# Altium PCB YAVP.PcbDoc (part 2 of 4)
Units mil, origin at the board's own origin, x right, y up, seen from the top; angles counter-clockwise.
Board outline 3188.93 x 2893.7 mil, 6 copper layers (Top Layer, Top, Mid-Layer 1, Top-Int, Mid-Layer 2, Bop-Int, Mid-Layer 3, Top-Mid, Mid-Layer 4, Bop-Mid, Bottom Layer, Bottom); 418 components, 278 nets, 1150 pads, 440 vias.
Unrouted connection lines stored in the file: 12.
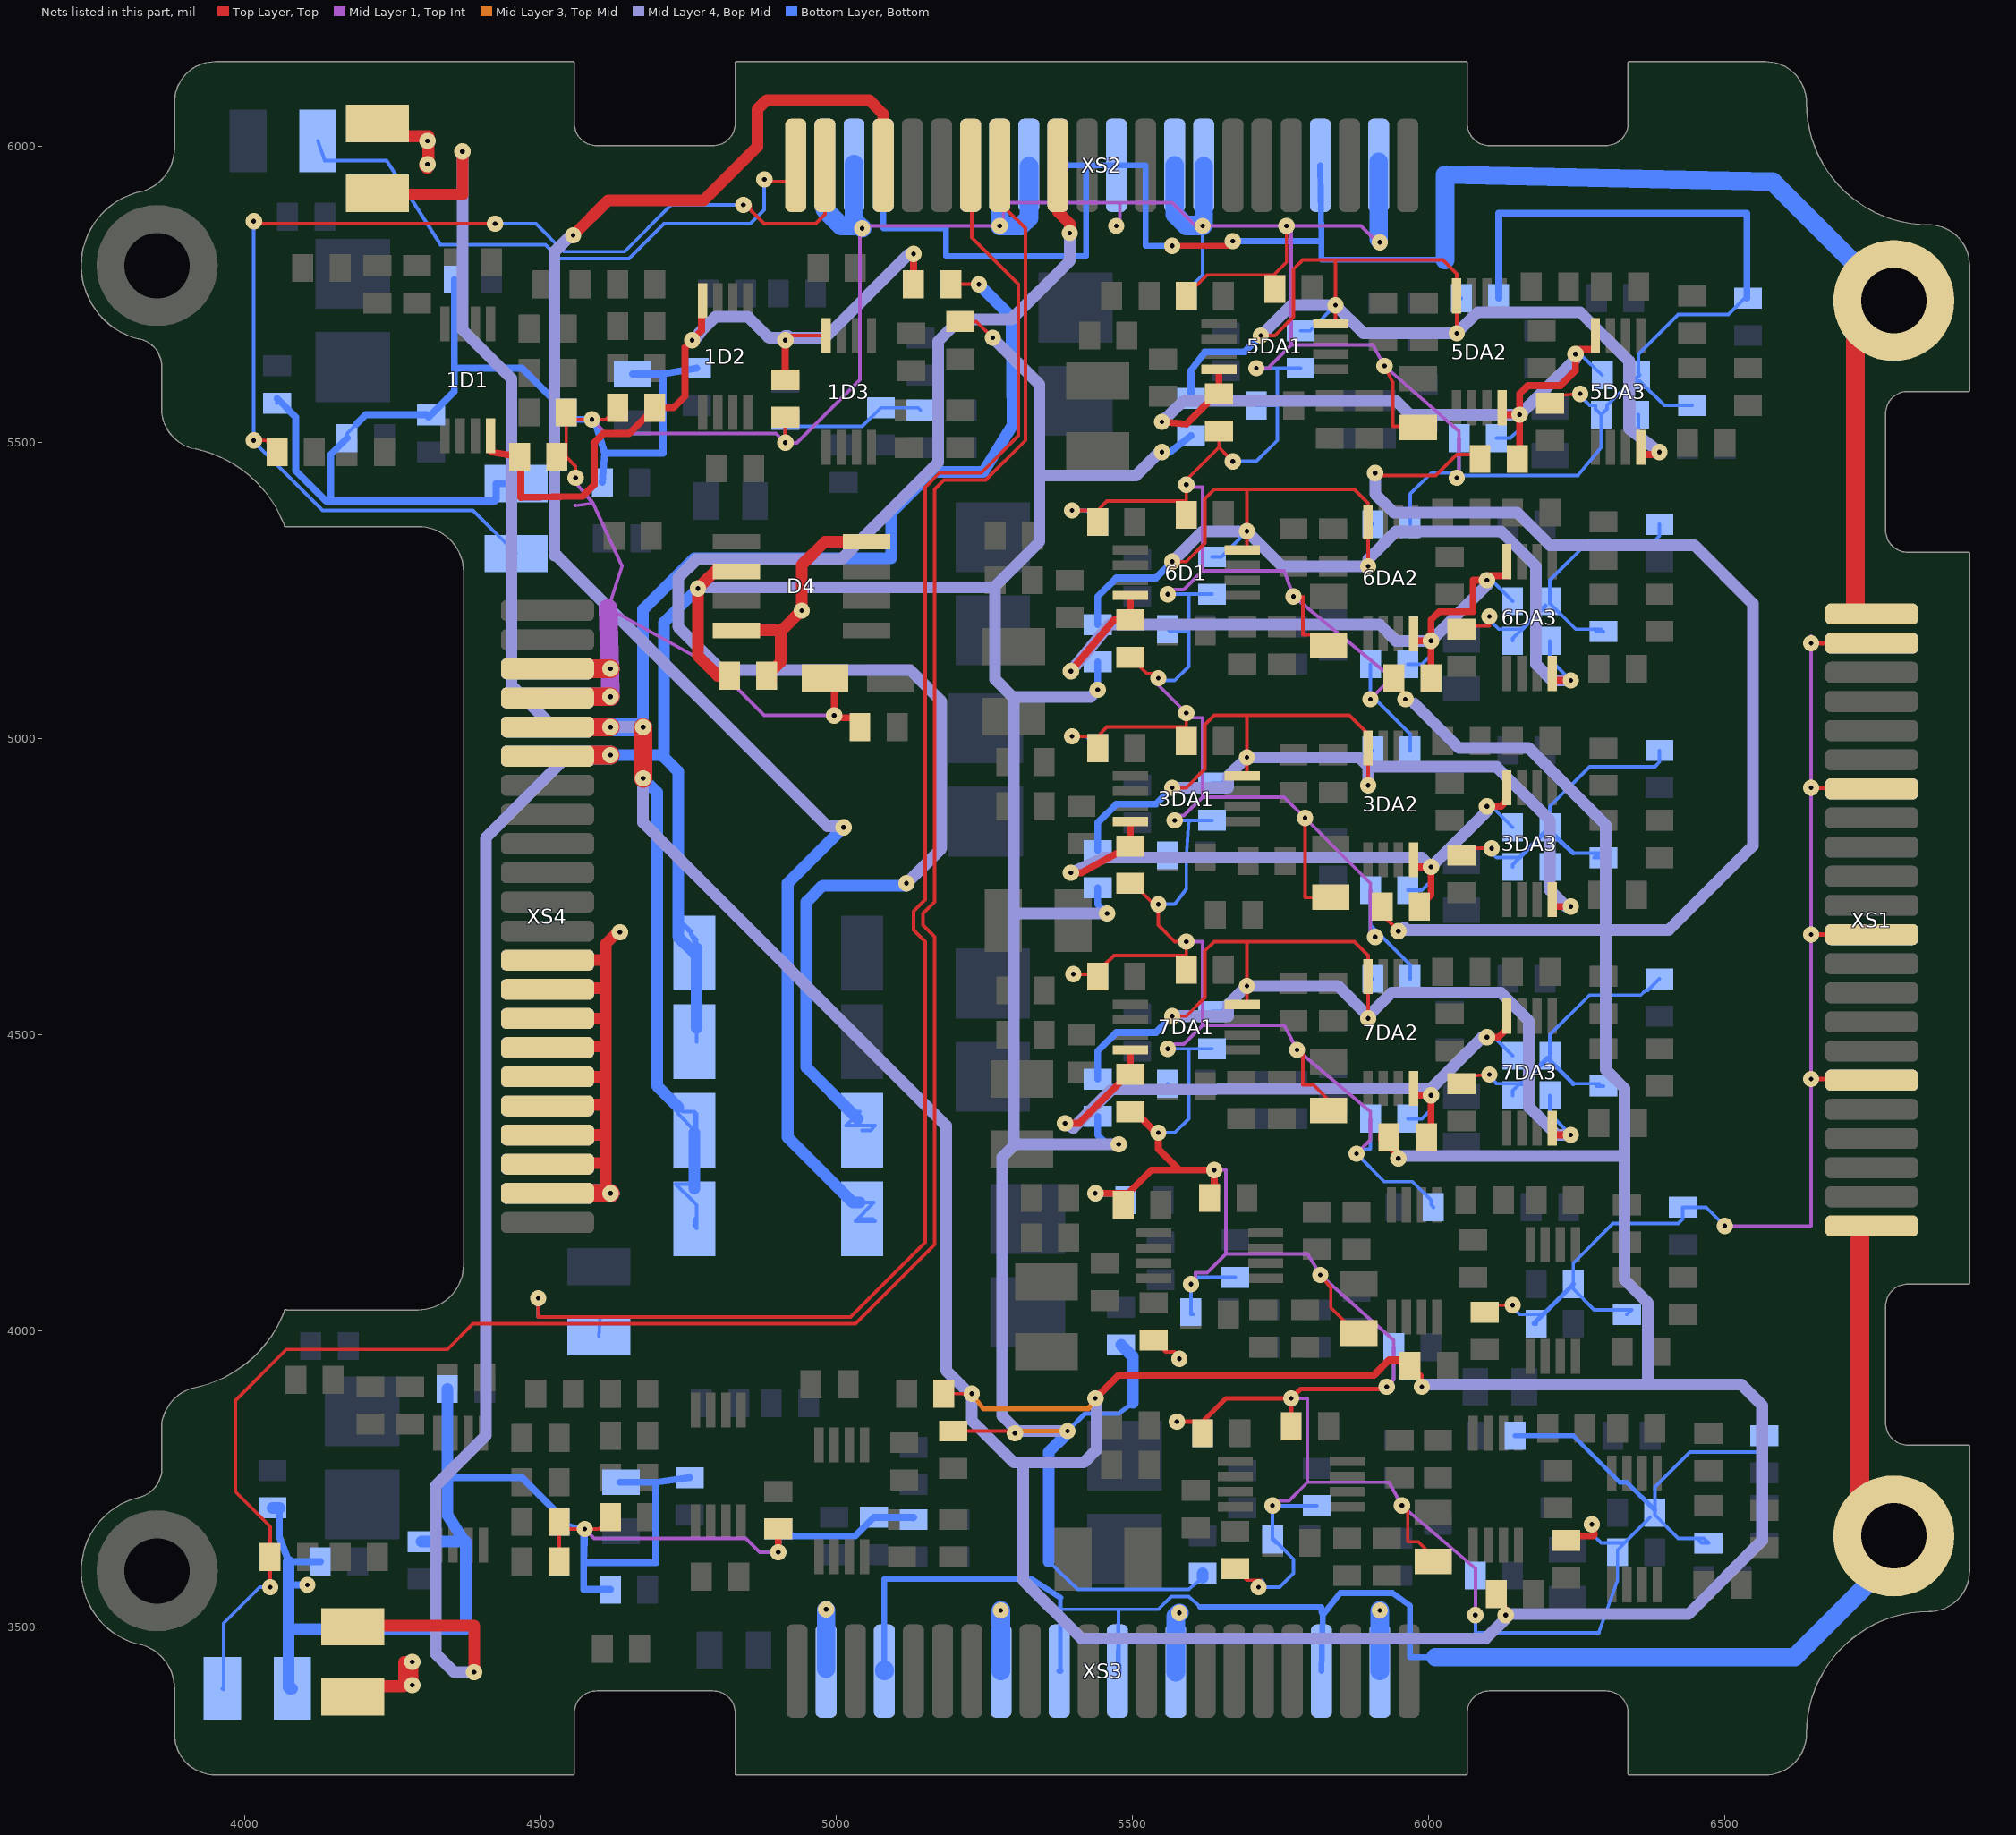
[diagram p6: the nets of this part, all layers, seen from the top]

## Via types
v1: diameter 27.56, hole 7.87, Top Layer, Top to Bottom Layer, Bottom, 440 vias

## Nets (pads, with @x,y where several pads share a name; then routed paths per layer and width w, separated by ;. In a path a pad name is that pad's centre, name@x,y a point inside that pad or via, vN(x,y) a via of type N, cw(c..) or ccw(c..) an arc to the next point about the centre after c; other vN are vias at no path point) (continued)
+15V: C3.2 C11.1 D4.2 R3.2 R4.2 R29.2 R31.2 R33.2 R35.2 R37.2 R39.2 R41.2 R43.2 XS4.16 XS4.37 | length 8216.2
  Top Layer, Top w5.91: v1@4771.65,5259.84 4771.65,5261.81 4775.59,5265.75 4777.56,5265.75 4779.53,5265.75 ; D4.2@4795.28,5283.46 D4.2@4834.65,5283.46 ; D4.2@4830.71,5282.68 D4.2@4833.86,5282.68 ; D4.2@4844.49,5284.65 4843.31,5283.46 D4.2@4842.52,5283.46 ; R31.2@5196.85,3830.71 5200.79,3830.71 5299.21,3830.71 v1(5301.18,3826.77) ; R29.2@5208.66,5704.72 5236.22,5704.72 v1(5263.78,5677.17) ; D4.2@4833.86,5282.68 4841.73,5282.68 D4.2@4842.52,5283.46 ; D4.2@4833.86,5282.68 D4.2@4834.65,5283.46 ; D4.2@4834.65,5283.46 D4.2@4842.52,5283.46
  Top Layer, Top w19.68: C3.2@4183.07,3500 4149.61,3501.97 4387.8,3501.97 v1(4387.8,3423.23) ; C11.1@4818.9,5106.3 4799.21,5106.3 4765.75,5139.76 v1(4765.75,5253.94) 4771.65,5259.84 4777.56,5265.75 4795.28,5283.46 4803.15,5283.46 4803.94,5282.68 D4.2@4830.71,5282.68
  Top Layer, Top w31.5: XS4.37@4511.81,4970.47 4511.81,4968.5 4515.75,4972.44 v1(4618.11,4972.44)
  Mid-Layer 3, Top-Mid w7.87: v1(5301.18,3826.77) 5307.09,3830.71 5385.83,3830.71 v1(5389.76,3830.71)
  Mid-Layer 4, Bop-Mid w5.91: 5299.21,4700.79 5303.15,4704.72 5299.21,4704.72 ; v1(5476.38,4314.96) v1@5480.31,4314.96 ; v1@5545.28,5484.25 v1(5549.21,5484.25)
  Mid-Layer 4, Bop-Mid w19.68: v1(4387.8,3423.23) 4354.33,3423.23 4322.83,3454.72 4322.83,3738.19 4407.48,3822.83 4407.48,4832.68 4545.28,4970.47 4616.14,4970.47 v1(4618.11,4972.44) ; v1(4765.75,5253.94) 4767.72,5255.91 4771.65,5255.91 5263.78,5255.91 5264.76,5254.92 ; v1(5263.78,5677.17) 5342.52,5598.43 5342.52,5444.88 ; 5299.21,4700.79 5299.21,4312.99 ; 5299.21,4704.72 5299.21,5070.87 ; 5303.15,4704.72 v1(5456.69,4704.72) ; v1(5389.76,3830.71) 5305.12,3830.71 5279.53,3856.3 5279.53,4293.31 5299.21,4312.99 ; v1(5440.94,5082.68) 5429.13,5070.87 5299.21,5070.87 ; v1(5476.38,4314.96) 5301.18,4314.96 5299.21,4312.99 ; v1@5545.28,5484.25 5505.91,5444.88 5342.52,5444.88 ; 5264.76,5254.92 5342.52,5332.68 5342.52,5444.88 ; 5264.76,5254.92 5263.78,5253.94 5265.75,5253.94 ; 5264.76,5254.92 5265.75,5253.94 ; 5265.75,5253.94 5267.72,5255.91 5267.72,5100.39 5299.21,5068.9 5299.21,5070.87
  Bottom Layer, Bottom w5.91: R4.2@4732.28,4692.91 R4.2@4753.94,4671.26 ; R4.2@4732.28,4696.85 4753.94,4675.2 R4.2@4753.94,4671.26 ; R4.2@4759.84,4641.73 R4.2@4763.78,4645.67 ; R3.2@4763.78,4488.19 R3.2@4763.78,4511.81 ; 5358.27,3610.24 5407.48,3562.99 5594.49,3562.99 R43.2@5618.11,3582.68 ; R4.2@4753.94,4671.26 4753.94,4669.29 R4.2@4763.78,4645.67 ; R4.2@4753.94,4671.26 4763.78,4661.42 R4.2@4763.78,4645.67
  Bottom Layer, Bottom w7.87: v1@5391.73,3832.68 5419.29,3860.24 5476.38,3860.24 5500,3877.95
  Bottom Layer, Bottom w11.81: R41.2@5440.94,4362.2 5440.94,4330.71 5456.69,4314.96 v1(5476.38,4314.96) ; R33.2@5440.94,4748.03 5440.94,4720.47 v1(5456.69,4704.72) ; v1(5440.94,5082.68) R39.2@5440.94,5129.92 ; v1(5549.21,5484.25) 5562.99,5484.25 R37.2@5598.43,5511.81
  Bottom Layer, Bottom w19.68: v1(4618.11,4972.44) 4704.72,4972.44 4708.66,4968.5 ; R4.2@4759.84,4637.8 4732.28,4665.35 4732.28,4692.91 4732.28,4696.85 4732.28,4944.88 4708.66,4968.5 ; R3.2@4763.78,4511.81 R4.2@4763.78,4645.67 ; v1(4765.75,5253.94) 4708.66,5196.85 4708.66,4968.5 ; 5358.27,3610.24 5358.27,3795.28 5385.83,3822.83 5385.83,3826.77 v1@5389.76,3826.77 ; v1@5391.73,3832.68 v1@5391.73,3828.74 ; R35.2@5480.31,3976.38 5500,3956.69 5500,3877.95 ; R43.2@5618.11,3582.68 R43.2@5618.11,3590.55 ; v1@5389.76,3826.77 v1@5391.73,3828.74 ; v1@5389.76,3826.77 v1(5389.76,3830.71) v1@5391.73,3828.74
  Bottom Layer, Bottom w31.5: XS4.16@4511.81,4970.47 4511.81,4968.5 4515.75,4972.44 v1(4618.11,4972.44)
+15V1: 3DA1.8 3DA2.8 3DA3.8 5DA1.8 5DA2.8 5DA3.8 6D1.8 6DA2.8 6DA3.8 7DA1.8 7DA2.8 7DA3.8 C18.1 C22_.1 C24.1 C26.1 C34.1 C38.1 C40.1 C42.1 C51.1 C54.1 C56.1 C58.1 R33.1 R37.1 R39.1 R41.1 | length 8221.8
  Top Layer, Top w5.91: v1(5566.93,4531.5) 5590.55,4531.5 5622.05,4562.99 5622.05,4641.73 5637.8,4657.48 5692.91,4657.48 ; v1(5566.93,4917.32) 5590.55,4917.32 5622.05,4948.82 5622.05,5023.62 5637.8,5039.37 5692.91,5039.37 ; v1(5566.93,5299.21) 5590.55,5299.21 5622.05,5330.71 5622.05,5405.51 5637.8,5421.26 5692.91,5421.26 ; 7DA1.8@5685.04,4551.18 5692.91,4551.18 v1(5692.91,4582.68) 5692.91,4657.48 ; 3DA1.8@5685.04,4937.01 5692.91,4937.01 v1(5692.91,4968.5) 5692.91,5039.37 ; 6D1.8@5685.04,5318.9 5692.91,5318.9 v1(5692.91,5350.39) 5692.91,5421.26 ; v1(5716.54,5681.1) 5740.16,5681.1 5771.65,5712.6 5771.65,5793.31 5787.4,5809.06 5842.52,5809.06 ; 5DA1.8@5834.65,5700.79 5842.52,5700.79 v1(5842.52,5732.28) 5842.52,5809.06 ; v1(5897.64,4527.56) 7DA2.8@5897.64,4598.43 5897.64,4633.86 5874.02,4657.48 5692.91,4657.48 ; v1(5897.64,4921.26) 3DA2.8@5897.64,4984.25 5897.64,5007.87 5866.14,5039.37 5692.91,5039.37 ; v1(5897.64,5291.34) 6DA2.8@5897.64,5366.14 5897.64,5397.64 5874.02,5421.26 5692.91,5421.26 ; v1(6047.24,5685.04) 5DA2.8@6047.24,5748.03 6047.24,5785.43 6023.62,5809.06 5842.52,5809.06 ; 7DA3.8@6208.66,4330.71 7DA3.8@6208.66,4342.52 ; 3DA3.8@6208.66,4716.54 3DA3.8@6208.66,4728.35 ; 6DA3.8@6208.66,5098.43 6DA3.8@6208.66,5110.24 ; 5DA3.8@6358.27,5480.31 5DA3.8@6358.27,5492.13 ; v1@6385.83,5480.31 v1(6389.76,5484.25)
  Top Layer, Top w11.81: 7DA3.8@6208.66,4330.71 v1(6240.16,4330.71) ; 3DA3.8@6208.66,4716.54 v1(6240.16,4716.54) ; 6DA3.8@6208.66,5098.43 v1(6240.16,5098.43) ; 5DA3.8@6358.27,5480.31 v1@6385.83,5480.31
  Mid-Layer 4, Bop-Mid w5.91: v1(5897.64,5291.34) v1@5897.64,5303.15 ; 6216.54,4330.71 6220.47,4326.77 6244.09,4326.77 v1(6240.16,4330.71) ; v1@6232.28,4716.54 v1(6240.16,4716.54)
  Mid-Layer 4, Bop-Mid w19.68: v1(5566.93,4531.5) 5661.42,4531.5 5661.42,4551.18 v1(5692.91,4582.68) 5846.46,4582.68 v1@5897.64,4531.5 ; v1(5566.93,4917.32) 5661.42,4917.32 5661.42,4937.01 v1(5692.91,4968.5) 5881.89,4968.5 5897.64,4952.76 ; v1(5566.93,5299.21) 5618.11,5350.39 v1(5692.91,5350.39) 5751.97,5291.34 v1(5897.64,5291.34) ; v1(5716.54,5681.1) 5767.72,5732.28 v1(5842.52,5732.28) 5889.76,5685.04 v1(6047.24,5685.04) 6082.68,5720.47 6255.91,5720.47 6338.58,5637.8 6338.58,5523.62 v1(6389.76,5484.25) ; v1(5897.64,4921.26) 5897.64,4952.76 ; v1@5897.64,5303.15 5944.88,5350.39 6122.05,5350.39 6181.1,5291.34 6181.1,5125.98 6208.66,5098.43 v1(6240.16,5098.43) ; v1@6232.28,4716.54 6204.72,4744.09 6204.72,4862.2 6114.17,4952.76 5897.64,4952.76 ; v1(6240.16,4330.71) 6228.35,4330.71 6216.54,4330.71 6169.29,4377.95 6169.29,4523.62 6122.05,4570.87 5937.01,4570.87 v1@5897.64,4531.5 ; v1@5897.64,4531.5 v1(5897.64,4527.56) 5901.57,4531.5 v1@5897.64,4531.5
  Bottom Layer, Bottom w5.91: R37.1@5590.55,5570.87 R37.1@5598.43,5574.8 ; C26.1@5633.86,4539.37 5649.61,4539.37 v1(5692.91,4582.68) ; C18.1@5633.86,4925.2 5649.61,4925.2 v1(5692.91,4968.5) ; C24.1@5633.86,5307.09 5649.61,5307.09 v1(5692.91,5350.39) ; C22_.1@5783.46,5688.98 5799.21,5688.98 v1(5842.52,5732.28) ; v1(5897.64,4527.56) 5897.64,4594.49 C42.1@5905.51,4594.49 ; v1(5897.64,4921.26) 5897.64,4980.31 C34.1@5905.51,4980.31 ; v1(5897.64,5291.34) 5897.64,5362.2 C40.1@5905.51,5362.2 ; v1(6047.24,5685.04) 6047.24,5744.09 C38.1@6055.12,5744.09 ; C58.1@6204.72,4397.64 6204.72,4366.14 v1(6240.16,4330.71) ; C51.1@6204.72,4783.46 6204.72,4751.97 v1(6240.16,4716.54) ; C56.1@6204.72,5165.35 6204.72,5133.86 v1(6240.16,5098.43) ; C54.1@6354.33,5547.24 6354.33,5515.75 6385.83,5484.25 v1(6389.76,5484.25)
  Bottom Layer, Bottom w11.81: R41.1@5440.94,4425.2 5440.94,4472.44 5472.44,4503.94 5539.37,4503.94 v1(5566.93,4531.5) ; R33.1@5440.94,4811.02 5440.94,4858.27 5472.44,4889.76 5539.37,4889.76 v1(5566.93,4917.32) ; R39.1@5440.94,5192.91 5440.94,5240.16 5472.44,5271.65 5539.37,5271.65 v1(5566.93,5299.21) ; R37.1@5598.43,5574.8 5598.43,5622.05 5622.05,5653.54 5688.98,5653.54 v1(5716.54,5681.1)
-12VCH1: R1.1 XS2.24 | length 2884.5
  Top Layer, Top w19.68: v1(4555.12,5850.39) 4614.17,5909.45 4775.59,5909.45 4866.14,6000 4866.14,6062.99 4881.89,6078.74 5055.12,6078.74 5078.74,6055.12 XS2.24@5078.74,5968.5
  Mid-Layer 4, Bop-Mid w5.91: v1@4547.24,5846.46 v1@4547.24,5854.33 ; v1@4547.24,5854.33 4551.18,5850.39 4551.18,5846.46 v1(4555.12,5850.39) 4551.18,5854.33 v1@4547.24,5854.33
  Mid-Layer 4, Bop-Mid w19.68: v1(5011.81,4850.39) 5003.94,4850.39 5001.97,4852.36 4984.25,4852.36 4527.56,5309.06 4523.62,5309.06 4523.62,5822.83 4547.24,5846.46 v1@4551.18,5850.39 ; v1@4551.18,5850.39 4555.12,5846.46 v1(4555.12,5850.39) v1@4551.18,5850.39
  Bottom Layer, Bottom w5.91: R1.1@5039.37,4216.54 5062.99,4216.54 5031.5,4185.04 5065.35,4185.04 5061.42,4188.98 R1.1@5043.31,4188.98
  Bottom Layer, Bottom w19.68: v1(5011.81,4850.39) 4917.32,4755.91 4917.32,4326.77 5027.56,4216.54 R1.1@5039.37,4216.54
-12VCH2: R2.1 XS2.30 | length 2812.1
  Top Layer, Top w19.68: XS2.30@5374.02,5968.5 5374.02,5889.76 5393.7,5870.08 v1(5393.7,5854.33)
  Mid-Layer 4, Bop-Mid w19.68: v1(5118.11,4755.91) 5177.17,4814.96 5177.17,5062.99 5124.02,5116.14 4805.12,5116.14 4732.28,5188.98 4732.28,5271.65 4763.78,5303.15 5007.87,5303.15 5171.26,5466.54 5171.26,5671.26 5208.66,5708.66 5295.28,5708.66 5393.7,5807.09 v1(5393.7,5854.33)
  Bottom Layer, Bottom w5.91: R2.1@5035.43,4358.27 R2.1@5035.43,4366.14 ; R2.1@5043.31,4338.58 5057.48,4338.58 5065.35,4346.46 5015.75,4346.46 5031.5,4362.2 R2.1@5035.43,4366.14 ; R2.1@5035.43,4366.14 5035.43,4370.08 5039.37,4370.08 R2.1@5035.43,4366.14 ; v1@5118.11,4751.97 5122.05,4755.91 5125.98,4755.91 v1(5118.11,4755.91) v1@5118.11,4751.97
  Bottom Layer, Bottom w19.68: R2.1@5035.43,4358.27 5031.5,4362.2 4948.82,4444.88 4948.82,4724.41 4976.38,4751.97 v1@5118.11,4751.97
-15V: C2.1 R1.2 R2.2 R30.2 R32.2 R34.2 R36.2 R38.2 R40.2 R42.2 R44.2 XS4.17 XS4.38 | length 13246.6
  Top Layer, Top w5.91: R32.2@5181.1,3893.7 v1(5228.35,3893.7) ; R30.2@5192.91,5767.72 v1(5240.16,5767.72) ; v1(5909.45,5448.82) 5913.39,5444.88 6011.81,5444.88 6047.24,5480.31 R38.2@6078.74,5480.31 ; R34.2@5921.26,4716.54 5917.32,4716.54 5917.32,4706.69 v1(5948.82,4675.2) ; R42.2@5933.07,4326.77 5929.13,4330.71 5917.32,4330.71 5917.32,4322.83 v1(5948.82,4291.34) ; R40.2@5940.94,5102.36 5933.07,5110.24 5933.07,5114.17 5929.13,5114.17 5946.85,5088.58 5968.5,5066.93 v1(5960.63,5066.93) ; R36.2@5956.69,3950.79 R36.2@5956.69,3952.76 ; R36.2@5968.5,3940.94 5958.66,3950.79 R36.2@5956.69,3952.76 ; v1(5988.19,3905.51) 5988.19,3925.2 5962.6,3950.79 5956.69,3956.69 R36.2@5956.69,3952.76 ; R38.2@6086.61,5472.44 R38.2@6078.74,5480.31 ; R44.2@6114.17,3555.12 R44.2@6114.17,3562.99 ; v1(6129.92,3519.68) 6129.92,3535.43 6118.11,3559.06 R44.2@6114.17,3562.99 ; R38.2@6078.74,5480.31 6082.68,5480.31 6082.68,5484.25 6074.8,5484.25 R38.2@6078.74,5480.31 ; R44.2@6114.17,3562.99 6114.17,3566.93 6110.24,3570.87 6106.3,3570.87 R44.2@6114.17,3562.99
  Top Layer, Top w11.81: v1(5437.01,3885.83) 5476.38,3925.2 5907.48,3925.2 5933.07,3950.79 5956.69,3950.79 5958.66,3950.79 R36.2@5962.6,3950.79
  Top Layer, Top w19.68: C2.1@4224.41,5921.26 4240.16,5919.29 4368.11,5919.29 v1(4368.11,5992.13)
  Top Layer, Top w31.5: XS4.38@4511.81,5019.69 v1(4618.11,5019.69) ; v1(4673.23,4933.07) v1(4673.23,5019.69)
  Mid-Layer 3, Top-Mid w7.87: v1(5228.35,3893.7) 5248.03,3868.11 5425.2,3868.11 v1(5437.01,3885.83)
  Mid-Layer 4, Bop-Mid w5.91: v1(5960.63,5066.93) 5968.5,5059.06 5976.38,5059.06
  Mid-Layer 4, Bop-Mid w19.68: v1(4368.11,5992.13) 4368.11,5690.94 4450.79,5608.27 4450.79,5088.58 4452.76,5088.58 4521.65,5019.69 v1(4618.11,5019.69) v1(4673.23,5019.69) v1(4673.23,4933.07) 4673.23,4858.27 5185.04,4346.46 5185.04,3933.07 5224.41,3893.7 v1(5228.35,3893.7) 5228.35,3848.43 5299.21,3777.56 5314.96,3777.56 ; v1(5437.01,3885.83) v1@5438.41,3884.42 ; v1(5909.45,5448.82) 5909.45,5413.39 5940.94,5381.89 6149.61,5381.89 6204.72,5326.77 6448.82,5326.77 6547.24,5228.35 6547.24,4818.9 6405.51,4677.17 6299.21,4677.17 ; v1(5948.82,4291.34) 5948.82,4295.28 6330.71,4295.28 ; v1(5948.82,4675.2) 5948.82,4671.26 5958.66,4681.1 5962.6,4677.17 6299.21,4677.17 ; 5976.38,5059.06 6051.18,4984.25 6169.29,4984.25 6299.21,4854.33 6299.21,4677.17 ; v1(5988.19,3905.51) 5992.13,3909.45 6370.08,3909.45 ; v1@6129.92,3515.75 6127.95,3513.78 6127.95,3521.65 6129.92,3523.62 v1@6131.89,3521.65 ; 5314.96,3777.56 5417.32,3777.56 5438.98,3799.21 v1@5438.98,3883.86 ; 5314.96,3777.56 5314.96,3578.74 5413.39,3480.32 6096.46,3480.32 6129.92,3513.78 v1(6129.92,3519.68) v1@6131.89,3521.65 ; v1@5438.41,3884.42 v1@5438.98,3883.86 ; v1@5438.41,3884.42 5438.98,3885.83 v1@5438.98,3883.86 ; v1@6131.89,3521.65 6438.98,3521.65 6562.99,3645.67 6562.99,3874.02 6527.56,3909.45 6370.08,3909.45 ; 6299.21,4677.17 6299.21,4440.94 6330.71,4409.45 6330.71,4295.28 ; 6330.71,4295.28 6330.71,4086.61 6370.08,4047.24 6370.08,3909.45
  Bottom Layer, Bottom w5.91: R1.2@4759.84,4188.98 4759.84,4177.17 4763.78,4173.23 4763.78,4212.6 4755.91,4220.47 4728.35,4248.03 4751.97,4248.03 R1.2@4759.84,4240.16 ; R2.2@4763.78,4322.83 R2.2@4763.78,4330.71 ; R2.2@4759.84,4338.58 4732.28,4366.14 4732.28,4370.08 4732.28,4377.95 4740.16,4370.08 R2.2@4759.84,4370.08 ; R2.2@4759.84,4338.58 R2.2@4759.84,4370.08 ; R2.2@4759.84,4338.58 4759.84,4334.65 R2.2@4763.78,4330.71 ; R2.2@4759.84,4370.08 4763.78,4366.14 R2.2@4763.78,4330.71
  Bottom Layer, Bottom w19.68: v1(4673.23,4933.07) 4696.85,4909.45 4696.85,4413.39 R2.2@4732.28,4377.95 ; v1(4673.23,5019.69) 4673.23,5218.5 4759.84,5305.12 5092.52,5305.12 5092.52,5381.89 5161.42,5450.79 5248.03,5450.79 5297.24,5529.53 5295.28,5712.6 v1(5240.16,5767.72) ; R1.2@4759.84,4240.16 R2.2@4759.84,4334.65
  Bottom Layer, Bottom w31.5: XS4.17@4511.81,5019.69 v1(4618.11,5019.69) v1(4673.23,5019.69)
-15V1: 1D1.4 1D2.4 1D3.4 3DA1.4 3DA2.4 3DA3.4 5DA1.4 5DA2.4 5DA3.4 6D1.4 6DA2.4 6DA3.4 7DA1.4 7DA2.4 7DA3.4 C15.2 C19.2 C23.2 C25.2 C27.2 C31.2 C35.2 C39.2 C41.2 C43.2 C47.2 C50.2 C55.2 C57.2 C59.2 R30.1 R34.1 R38.1 R40.1 R42.1 | length 6891.9
  Top Layer, Top w5.91: 1D1.4@4415.35,5511.81 4417.32,5511.81 1D1.4@4417.32,5484.25 ; C15.2@4464.57,5476.38 C15.2@4466.54,5476.38 ; 1D2.4@4771.65,5736.22 1D2.4@4773.62,5740.16 1D2.4@4771.65,5744.09 ; v1(4913.39,5673.23) 4921.26,5681.1 1D3.4@4982.28,5681.1 ; C23.2@5645.67,5582.68 C23.2@5645.67,5586.61 ; 5DA1.4@5645.67,5618.11 5DA1.4@5645.67,5624.02 ; 6DA2.4@5974.41,5165.35 6DA2.4@5974.41,5177.17 ; R42.1@5996.06,4326.77 R42.1@6003.94,4334.65 ; R40.1@6003.94,5102.36 6003.94,5110.24 R40.1@6003.94,5118.11 ; 5DA2.4@6124.02,5559.06 6124.02,5549.21 5DA2.4@6125.98,5547.24 ; 7DA3.4@6129.92,4507.87 6129.92,4531.5 7DA3.4@6131.89,4531.5 ; 3DA3.4@6131.89,4895.67 3DA3.4@6131.89,4917.32 ; 6DA3.4@6131.89,5275.59 6DA3.4@6131.89,5299.21 ; 5DA3.4@6281.5,5657.48 5DA3.4@6281.5,5681.1
  Top Layer, Top w11.81: 1D1.4@4417.32,5484.25 C15.2@4464.57,5476.38 ; C15.2@4466.54,5476.38 4466.54,5407.48 4570.87,5409.45 4590.55,5429.13 4590.55,5500 4606.3,5515.75 4649.61,5515.75 C31.2@4692.91,5559.06 4724.41,5559.06 4744.09,5578.74 4744.09,5661.42 v1(4755.91,5673.23) 4771.65,5688.98 1D2.4@4771.65,5736.22 ; C47.2@4913.39,5606.3 v1(4913.39,5673.23) ; R30.1@5129.92,5767.72 v1(5129.92,5818.9) ; v1(5385.83,4350.39) 5409.45,4350.39 C27.2@5492.13,4433.07 ; v1(5395.67,4773.62) 5413.39,4773.62 C19.2@5496.06,4818.9 3DA1.4@5496.06,4860.24 ; v1(5395.67,5114.17) 5468.5,5200.79 C25.2@5496.06,5200.79 6D1.4@5496.06,5242.13 ; C27.2@5496.06,4433.07 C27.2@5492.13,4433.07 ; 7DA1.4@5496.06,4474.41 5496.06,4437.01 C27.2@5492.13,4433.07 ; v1(5549.21,5535.43) 5590.55,5531.5 5645.67,5586.61 5DA1.4@5645.67,5618.11 ; 7DA2.4@5974.41,4409.45 5974.41,4397.64 v1(6003.94,4397.64) R42.1@6003.94,4334.65 ; 3DA2.4@5974.41,4795.28 5974.41,4783.46 v1(6003.94,4783.46) 6003.94,4736.22 R34.1@5984.25,4716.54 ; 6DA2.4@5974.41,5165.35 v1(6003.94,5165.35) ; R40.1@6003.94,5118.11 v1(6003.94,5165.35) ; v1(6098.43,4496.06) 6118.11,4496.06 7DA3.4@6129.92,4507.87 ; v1(6098.43,4885.83) 6122.05,4885.83 3DA3.4@6131.89,4895.67 ; 5DA2.4@6125.98,5547.24 v1(6153.54,5547.24) ; 6DA3.4@6131.89,5275.59 6102.36,5275.59 6098.43,5271.65 v1(6098.43,5267.72) 6074.8,5267.72 6074.8,5214.57 6017.72,5214.57 6003.94,5200.79 v1(6003.94,5165.35) ; R38.1@6149.61,5472.44 6153.54,5476.38 6153.54,5480.31 6153.54,5484.25 v1(6153.54,5547.24) ; 5DA3.4@6281.5,5657.48 6253.94,5657.48 6248.03,5651.57 v1(6248.03,5649.61) 6248.03,5622.05 6222.44,5596.46 6167.32,5596.46 6153.54,5582.68 v1(6153.54,5547.24)
  Mid-Layer 4, Bop-Mid w5.91: v1(4755.91,5673.23) 4763.78,5681.1 4767.72,5685.04 ; 4768.37,5685.04 4768.7,5685.04 4769.03,5685.04 ; 4848.82,5712.6 4880.31,5681.1 4881.89,5681.1 4905.51,5681.1 4906.59,5680.02 4909.45,5677.17 v1(4913.39,5673.23) ; v1@5122.05,5818.9 v1(5129.92,5818.9) ; 5996.06,4409.45 6000,4405.51 6003.94,4401.57 v1(6003.94,4397.64) ; v1@6003.94,4779.53 v1(6003.94,4783.46) ; v1(6003.94,5165.35) v1@6003.94,5173.23 ; v1@6098.43,5259.84 v1(6098.43,5267.72) ; v1(6153.54,5547.24) v1@6153.54,5555.12 ; v1@6248.03,5641.73 v1(6248.03,5649.61)
  Mid-Layer 4, Bop-Mid w19.68: v1(4755.91,5673.23) 4759.84,5673.23 4767.72,5683.73 ; v1(4913.39,5673.23) v1@4913.39,5677.17 ; v1@5122.05,5818.9 4980.31,5677.17 v1@4914.47,5677.17 ; v1(5385.83,4350.39) 5399.61,4342.52 5464.57,4407.48 5996.06,4409.45 ; v1(5395.67,4773.62) 5452.76,4799.21 5988.19,4799.21 v1(6003.94,4783.46) 6011.81,4791.34 6094.49,4874.02 6098.43,4877.95 v1(6098.43,4885.83) ; v1(5395.67,5114.17) 5460.63,5192.91 5917.32,5192.91 5944.88,5165.35 v1(6003.94,5165.35) v1@6098.43,5259.84 ; v1(5549.21,5535.43) 5586.61,5570.87 5944.88,5570.87 5968.5,5547.24 v1(6153.54,5547.24) v1@6248.03,5641.73 ; v1@6000,4405.51 6090.55,4496.06 v1(6098.43,4496.06) ; 4767.72,5683.73 4768.7,5685.04 4769.69,5686.35 ; 4767.72,5683.73 4769.03,5685.04 4768.37,5685.04 ; 4768.37,5685.04 4767.72,5685.04 4769.69,5687.01 ; 4768.37,5685.04 4769.69,5686.35 ; 4769.69,5686.35 4769.69,5687.01 ; 4769.69,5686.35 4771.65,5688.98 ; 4769.69,5687.01 4771.65,5688.98 ; 4771.65,5688.98 4795.28,5712.6 4848.82,5712.6 4850.39,5712.6 4881.89,5681.1 4885.83,5677.17 4909.45,5677.17 v1@4913.39,5677.17 ; v1@4913.39,5677.17 4913.39,5680.02 4917.32,5680.02 v1@4914.47,5677.17 ; v1@4913.39,5677.17 v1@4914.47,5677.17
  Bottom Layer, Bottom w5.91: C43.2@5964.57,4358.27 5988.19,4358.27 6003.94,4374.02 v1(6003.94,4397.64) ; C35.2@5964.57,4744.09 5988.19,4744.09 6003.94,4759.84 v1(6003.94,4783.46) ; C41.2@5964.57,5125.98 5988.19,5125.98 6003.94,5141.73 v1(6003.94,5165.35) ; v1(6098.43,4496.06) 6102.36,4500 6106.3,4500 6110.24,4496.06 C59.2@6141.73,4464.57 ; v1(6098.43,4885.83) 6106.3,4885.83 C50.2@6141.73,4850.39 ; v1(6098.43,5267.72) 6106.3,5267.72 C57.2@6141.73,5232.28 ; C39.2@6114.17,5507.87 6129.92,5507.87 6137.8,5507.87 6153.54,5523.62 v1(6153.54,5547.24) ; v1(6248.03,5649.61) 6255.91,5649.61 C55.2@6293.31,5614.17
EARTH: pad.1@6785.43,3653.54 pad.1@6785.43,5740.16 XS1.21 XS1.42 XS2.3 XS2.9 XS2.11 XS2.18 XS3.3 XS3.10 XS3.12 XS3.18 | length 6634.9
  Top Layer, Top w10: v1(5566.93,5832.68) 5667.32,5832.68 v1(5669.29,5840.55)
  Top Layer, Top w31.5: XS1.42@6748.03,4177.17 6728.35,4177.17 6728.35,3692.91 6767.72,3653.54 pad.1@6785.43,3653.54 pad.1@6787.4,3653.54 ; XS1.21@6748.03,5210.63 6720.47,5210.63 6720.47,5704.72 6771.65,5740.16 6783.46,5740.16 pad.1@6785.43,5740.16
  Bottom Layer, Bottom w5.91: XS3.18@5080.71,3427.17 5082.68,3429.13 5082.68,3484.25 XS3.18@5080.71,3482.28 ; 5377.95,3529.53 5476.38,3529.53 ; XS3.10@5476.38,3427.17 XS3.10@5474.41,3425.2 ; XS3.10@5476.62,3435.05 5476.38,3529.53 ; 5614.17,3533.46 5594.49,3551.18 5564.96,3551.18 5543.31,3529.53 5476.38,3529.53 ; XS3.10@5474.41,3425.2 5474.63,3437.03 5476.38,3529.53 ; XS3.10@5474.41,3425.2 5474.41,3431.1 5474.53,3437.13 5476.38,3529.53
  Bottom Layer, Bottom w7.87: XS3.12@5377.95,3425.2 5377.95,3529.53 5377.95,3549.21
  Bottom Layer, Bottom w10: XS2.3@5078.74,5976.38 XS2.3@5078.74,5968.5 5078.74,5862.2 5185.04,5862.2 5185.04,5814.96 5421.26,5814.96 5421.26,5968.5 ; XS3.18@5080.71,3427.17 5080.71,3482.28 5080.71,3580.71 5328.74,3580.71 5377.95,3549.21 ; XS2.9@5372.05,5968.5 XS2.9@5374.02,5968.5 5421.26,5968.5 ; XS3.12@5375.98,3425.2 XS3.12@5377.95,3425.2 ; XS3.10@5474.41,3425.2 XS3.10@5476.38,3428.92 ; XS3.10@5474.53,3437.13 5474.63,3437.03 5476.62,3435.05 XS3.10@5476.38,3428.92 ; XS3.10@5476.38,3423.23 5476.38,3427.17 XS3.10@5476.38,3428.92 ; v1(5566.93,5832.68) 5521.65,5832.68 5521.65,5968.5 XS2.11@5472.44,5968.5 5421.26,5968.5 ; 5614.17,3533.46 5818.9,3533.46 5818.9,3525.59 5820.87,3519.68 ; v1(5669.29,5840.55) 5818.51,5840.55 ; XS3.3@5818.9,3425.2 5820.87,3519.68 ; 6011.81,3448.82 5968.5,3448.82 5968.5,3535.43 5938.98,3557.09 5850.39,3557.09 5820.87,3519.68 ; 6027.56,5809.06 5818.9,5809.06 5818.51,5840.55 ; 5818.51,5840.55 5818.9,5840.55 XS2.18@5816.93,5968.5 5818.51,5840.55
  Bottom Layer, Bottom w31.5: XS3.18@5080.71,3425.2 XS3.18@5080.71,3427.17 ; 6011.81,3448.82 6618.11,3448.82 6783.46,3614.17 6783.46,3649.61 6787.4,3653.54 pad.1@6785.43,3653.54 ; 6027.56,5809.06 6027.56,5952.76 6580.71,5940.94 6761.81,5759.84 6787.4,5744.09 6783.46,5740.16 pad.1@6785.43,5740.16
GND: 1C1U.2 1C2.2 1C5.2 1C7.2 1C10_.1 1R2.2 1R5U.2 1R7Q.1 1R19.2 1R25.2 2C1U.2 2C2.2 2C5.2 2C7.2 2C10.1 2R2.2 2R5U.2 2R7.1 2R19.2 2R25.2 3C2.2 3C5.2 3C7.2 3C10.1 3R2.2 3R7.1 3R19.2 3R25.2 4C2.2 4C5.2 4C7.2 4C10.1 4R2.2 4R7.1 4R19.2 4R25.2 5C2.2 5C5.2 5C7.2 5C10.1 5R2.2 5R7.1 5R19.2 5R25.2 6C2.2 6C5.2 6C7.2 6C10.1 6R2.2 6R7.1 6R19.2 6R25.2 7C2.2 7C5.2 7C7.2 7C10.1 7R2.2 7R7.1 7R19.2 7R25.2 8C2.2 8C5.2 8C7.2 8C10.1 8R2.2 8R7.1 8R19.2 8R25.2 C2.2 C3.1 C11.2 C12.2 C13.2 C14.2 C15.1 C16.2 C17.1 C18.2 C19.1 C21.1 C22.2 C22_.2 C23.1 C24.2 C25.1 C26.2 C27.1 C28.2 C29.1 C30.2 C31.1 C32.2 C33.1 C34.2 C35.1 C36.2 C37.1 C38.2 C39.1 C40.2 C41.1 C42.2 C43.1 C44.2 C45.1 C46.2 C47.1 C48.1 C49.2 C50.1 C51.2 C52.2 C53.1 C54.2 C55.1 C56.2 C57.1 C58.2 C59.1 C60.1 C61.2 D4.4 D4.8 XS1.1 XS1.6 XS1.11 XS1.16 XS1.22 XS1.27 XS1.32 XS1.37 XS2.1 XS2.2 XS2.7 XS2.8 XS2.13 XS2.14 XS2.20 XS3.1 XS3.8 XS3.14 XS3.20 XS4.1 XS4.18 XS4.19 XS4.22 XS4.23 XS4.24 XS4.25 XS4.26 XS4.27 XS4.28 XS4.29 XS4.30 XS4.39 XS4.40 | length 30625
  Top Layer, Top w5.91: XS4.23@4511.81,4281.5 XS4.23@4511.81,4283.46 ; XS4.25@4511.81,4379.92 XS4.25@4511.81,4381.89 ; XS4.27@4511.81,4478.35 XS4.27@4511.81,4480.31 ; XS4.29@4511.81,4576.77 XS4.29@4511.81,4578.74 ; C15.1@4527.56,5476.38 C15.1@4543.31,5476.38 ; C17.1@4531.5,3610.24 2C5.2@4531.5,3665.35 ; 2C5.2@4531.5,3677.17 2C5.2@4531.5,3665.35 ; 1C5.2@4543.31,5551.18 1C5.2@4543.31,5539.37 ; v1(4559.06,5440.94) 4559.06,5460.63 C15.1@4543.31,5476.38 ; C33.1@4618.11,3685.04 4598.43,3665.35 v1(4574.8,3665.35) 2C5.2@4531.5,3665.35 ; C31.1@4629.92,5559.06 4610.24,5539.37 v1(4586.61,5539.37) 1C5.2@4543.31,5539.37 ; v1(4913.39,5500) C47.1@4913.39,5543.31 ; C13.2@4980.31,5102.36 4984.25,5106.3 C13.2@4996.06,5106.3 ; C12.2@5035.43,5035.43 5039.37,5039.37 C12.2@5039.37,5019.69 ; v1(5397.64,5003.94) 3C2.2@5440.94,5003.94 ; v1(5397.64,5385.83) 6C2.2@5440.94,5385.83 ; v1(5399.61,4602.36) 7C2.2@5435.04,4602.36 ; 7C2.2@5440.94,4598.43 5440.94,4606.3 7C2.2@5435.04,4602.36 ; 3C2.2@5440.94,4984.25 3C2.2@5440.94,5003.94 ; 6C2.2@5440.94,5366.14 6C2.2@5440.94,5385.83 ; 4C2.2@5484.25,4212.6 5480.31,4212.6 5480.31,4220.47 4C2.2@5492.13,4232.28 ; C27.1@5496.06,4370.08 C27.1@5503.94,4370.08 ; C19.1@5496.06,4755.91 5500,4755.91 v1@5535.43,4720.47 ; C25.1@5496.06,5137.8 5523.62,5110.24 5535.43,5110.24 v1(5543.31,5102.36) ; C21.1@5535.43,3984.25 5555.12,3964.57 5570.87,3964.57 5570.87,3960.63 v1(5578.74,3952.76) ; v1@5543.31,4330.71 5539.37,4334.65 v1(5543.31,4334.65) ; v1(5543.31,4720.47) v1@5535.43,4720.47 ; 7C5.2@5590.55,4610.24 5590.55,4633.86 ; 3C5.2@5590.55,4996.06 3C5.2@5590.55,5019.69 ; v1(5590.55,5043.31) 3C5.2@5590.55,5019.69 ; 6C5.2@5590.55,5377.95 6C5.2@5590.55,5401.57 ; 5C2.2@5590.55,5748.03 5625.98,5783.46 5738.19,5783.46 ; 4C5.2@5629.92,4224.41 4C5.2@5629.92,4236.22 ; 5637.8,4248.03 5633.86,4244.09 4C5.2@5633.86,4240.16 ; v1(5637.8,4271.65) v1@5645.67,4271.65 ; 4C5.2@5641.73,4240.16 4C5.2@5633.86,4240.16 ; C23.1@5645.67,5519.69 5645.67,5492.13 ; v1(5669.29,5468.5) 5661.42,5476.38 5645.67,5492.13 ; C29.1@5673.23,3598.43 5692.91,3578.74 5716.54,3578.74 5716.54,3570.87 v1(5712.6,3566.93) ; 5C5.2@5740.16,5759.84 5740.16,5781.5 5738.19,5783.46 ; v1(5759.84,5866.14) 5759.84,5805.12 5738.19,5783.46 ; v1(5771.65,5240.16) 5767.72,5240.16 5787.4,5240.16 5787.4,5175.2 5807.09,5175.2 5838.58,5143.7 6C7.2@5838.58,5149.61 ; v1(5777.56,4474.41) 5781.5,4466.54 5787.4,4466.54 5787.4,4415.35 5805.12,4415.35 5838.58,4381.89 5830.71,4374.02 7C7.2@5830.71,4372.05 ; v1(5791.34,4866.14) 5791.34,4862.2 5791.34,4732.28 3C7.2@5834.65,4732.28 3C7.2@5832.68,4736.22 ; v1(5816.93,4094.49) 5834.65,4072.83 5834.65,4039.37 4C7.2@5877.95,3996.06 ; v1(5925.2,5629.92) 5938.98,5602.36 5938.98,5527.56 5C7.2@5984.25,5527.56 ; v1(5954.72,3704.72) 5948.82,3702.76 5964.57,3702.76 5964.57,3643.7 5982.28,3643.7 6015.75,3610.24 8C7.2@6007.87,3610.24 ; 5C7.2@5982.28,5525.59 5C7.2@5984.25,5527.56 ; 5C7.2@5992.13,5535.43 5C7.2@5984.25,5527.56 ; 7R19.2@6055.12,4417.32 6055.12,4429.13 v1(6102.36,4433.07) ; 3R19.2@6055.12,4803.15 6055.12,4814.96 v1(6106.3,4814.96) ; 6R19.2@6055.12,5185.04 6057.09,5190.94 6102.36,5190.94 v1(6102.36,5206.69) ; 4R19.2@6094.49,4031.5 6094.49,4043.31 v1(6141.73,4043.31) ; 5R19.2@6204.72,5566.93 6204.72,5578.74 v1(6255.91,5582.68) ; 8R19.2@6230.31,3653.54 6232.28,3651.57 8R19.2@6232.28,3645.67 ; XS1.37@6748.03,4423.23 XS1.37@6748.03,4425.2 ; XS1.27@6748.03,4915.35 XS1.27@6748.03,4917.32 ; C15.1@4543.31,5476.38 1C5.2@4543.31,5539.37 ; 7C2.2@5435.04,4602.36 5468.5,4633.86 5590.55,4633.86 ; 3C2.2@5440.94,5003.94 5456.69,5019.69 3C5.2@5590.55,5019.69 ; 6C2.2@5440.94,5385.83 5456.69,5401.57 6C5.2@5590.55,5401.57 ; v1@5535.43,4720.47 5543.31,4712.6 5543.31,4708.66 5543.31,4685.04 5570.87,4657.48 v1(5590.55,4657.48) 5590.55,4633.86 ; 6C5.2@5590.55,5401.57 5590.55,5425.2 v1(5590.55,5429.13) ; v1(5590.55,5429.13) 5586.61,5433.07 v1@5590.55,5433.07 ; v1(5590.55,5429.13) v1@5590.55,5433.07 ; v1@5590.55,5433.07 5590.55,5437.01 5645.67,5492.13 ; 4C5.2@5629.92,4236.22 4C5.2@5633.86,4240.16 ; 4C5.2@5629.92,4236.22 5625.98,4240.16 4C5.2@5629.92,4240.16 ; 4C5.2@5629.92,4236.22 4C5.2@5629.92,4240.16 ; 4C5.2@5629.92,4240.16 4C5.2@5633.86,4240.16
  Top Layer, Top w7.87: v1(5574.8,3846.46) 8C2.2@5618.11,3846.46 ; 8C2.2@5618.11,3826.77 8C2.2@5618.11,3846.46 ; 8C5.2@5767.72,3838.58 v1(5767.72,3885.83) ; v1@5937.01,3901.57 v1@5933.07,3901.57 ; v1(6645.67,4425.2) XS1.37@6748.03,4425.2 ; v1(6645.67,4669.29) XS1.32@6748.03,4669.29 ; v1(6645.67,4917.32) XS1.27@6748.03,4917.32 ; v1(6645.67,5161.42) XS1.22@6748.03,5161.42 ; 8C2.2@5618.11,3846.46 5622.05,3850.39 5657.48,3885.83 v1(5767.72,3885.83) ; v1(5767.72,3885.83) 5771.65,3889.76 5783.46,3901.57 v1@5929.13,3901.57 ; v1@5929.13,3901.57 v1(5929.13,3905.51) v1@5933.07,3901.57 ; v1@5929.13,3901.57 v1@5933.07,3901.57
  Top Layer, Top w11.81: v1(4901.57,3625.98) C48.1@4901.57,3665.35 ; v1(4996.06,5039.37) v1@5000,5039.37 ; C13.2@4996.06,5106.3 4996.06,5043.31 v1@5000,5039.37 ; C12.2@5035.43,5035.43 5003.94,5035.43 v1@5000,5039.37 ; v1(5437.01,4232.28) 5492.13,4232.28 5531.5,4271.65 5578.74,4271.65 ; C27.1@5503.94,4370.08 v1@5539.37,4334.65 ; v1@5543.31,4330.71 5543.31,4307.09 5578.74,4271.65 ; 4C5.2@5629.92,4224.41 5641.73,4236.22 5641.73,4240.16 5641.73,4244.09 5637.8,4248.03 5637.8,4267.72 v1(5637.8,4271.65) 5578.74,4271.65 ; 8R19.2@6230.31,3653.54 6277.56,3653.54 6279.53,3655.51 v1(6275.59,3673.23)
  Top Layer, Top w19.68: C2.2@4224.41,6039.37 4230.31,6023.62 4234.25,6017.72 v1@4311.02,6017.72 ; C3.1@4230.31,3399.61 4269.69,3399.61 4269.69,3440.94 v1(4283.46,3440.94) v1(4283.46,3401.57) ; v1@4305.12,5966.54 v1@4306.1,5967.52 ; v1@4310.42,5968.5 v1@4311.02,5978.35 ; XS4.23@4511.81,4283.46 4610.24,4283.46 ; XS4.24@4511.81,4330.71 4610.24,4330.71 ; XS4.25@4511.81,4381.89 4610.24,4381.89 ; XS4.26@4511.81,4429.13 4610.24,4429.13 ; XS4.27@4511.81,4480.31 4610.24,4480.31 ; XS4.28@4511.81,4527.56 4610.24,4527.56 ; XS4.29@4511.81,4578.74 4610.24,4578.74 ; XS4.30@4511.81,4625.98 4578.74,4625.98 4610.24,4625.98 ; v1@4610.24,4232.28 4610.24,4283.46 ; v1(4633.86,4673.23) 4629.92,4673.23 4610.24,4653.54 4610.24,4625.98 ; D4.4@4830.71,5182.68 4828.74,5183.07 4905.51,5183.07 ; C11.2@4889.76,5098.43 4874.02,5098.43 C11.2@4881.89,5106.3 4905.51,5129.92 4905.51,5183.07 ; 4905.51,5185.04 4905.51,5183.07 ; D4.8@5050.71,5332.68 4980.31,5332.68 4940.94,5293.31 v1(4940.94,5216.54) 4907.48,5183.07 4905.51,5183.07 ; v1@4306.1,5967.52 4307.09,5966.54 v1@4307.28,5966.14 ; v1@4306.1,5967.52 v1@4307.09,5968.5 ; v1@4307.09,5968.5 v1@4307.28,5966.14 ; v1@4307.09,5968.5 v1@4309.13,5968.5 ; v1@4307.28,5966.14 4308.87,5962.96 4309.09,5968.5 v1@4309.11,5969.03 ; v1@4309.11,5969.03 v1@4309.17,5970.47 ; v1@4309.11,5969.03 v1(4309.06,5970.47) v1@4309.17,5970.47 ; v1@4309.11,5969.03 v1@4309.13,5968.5 ; v1@4309.13,5968.5 v1@4310.06,5968.5 ; v1@4309.17,5970.47 v1@4310.65,6008.25 ; v1@4309.36,6009.54 v1@4310.65,6008.25 ; v1@4309.36,6009.54 v1@4309.42,6009.84 ; v1@4309.36,6009.54 v1(4309.06,6009.84) v1@4309.42,6009.84 ; v1@4309.42,6009.84 v1@4310.71,6009.84 ; v1@4309.42,6009.84 v1@4311.02,6017.72 ; v1@4310.06,5968.5 v1@4310.51,5968.5 ; v1@4310.06,5968.5 v1@4311.02,5978.35 ; v1@4310.51,5968.5 v1@4311.02,5978.35 ; v1@4310.51,5968.5 v1@4310.87,5968.5 ; v1@4310.65,6008.25 v1@4310.71,6009.84 ; v1@4310.65,6008.25 v1@4311.02,6007.87 ; v1@4310.71,6009.84 v1@4311.02,6017.72 ; v1@4310.71,6009.84 4311.02,6009.84 v1@4311.02,6007.87 ; v1@4310.87,5968.5 v1@4311.02,5970.47 ; v1@4310.87,5968.5 4311.02,5968.5 v1@4311.02,5970.47 ; v1@4311.02,5970.47 v1@4311.02,5978.35 ; v1@4311.02,5978.35 v1@4311.02,6007.87 ; 4610.24,4283.46 4610.24,4330.71 ; 4610.24,4330.71 4610.24,4381.89 ; 4610.24,4381.89 4610.24,4429.13 ; 4610.24,4429.13 4610.24,4480.31 ; 4610.24,4480.31 4610.24,4527.56 ; 4610.24,4527.56 4610.24,4578.74 ; 4610.24,4578.74 4610.24,4625.98
  Top Layer, Top w31.5: XS4.22@4511.81,4232.28 4610.24,4232.28 v1(4618.11,4232.28) ; XS4.39@4511.81,5066.93 XS4.39@4511.81,5068.9 4511.81,5070.87 v1(4618.11,5070.87) ; XS4.40@4511.81,5118.11 v1(4618.11,5118.11)
  Mid-Layer 1, Top-Int w5.91: 4559.06,5393.7 4588.58,5397.64 ; v1@4562.99,5440.94 v1(4559.06,5440.94) ; v1(4574.8,3665.35) 4590.55,3649.61 4846.46,3649.61 4870.08,3625.98 v1(4901.57,3625.98) ; v1(4586.61,5539.37) 4610.24,5515.75 4897.64,5515.75 v1(4913.39,5500) 4933.07,5500 5039.37,5606.3 5039.37,5858.27 v1(5043.31,5862.2) v1@5039.37,5866.14 ; v1(4618.11,5118.11) 4614.17,5220.47 ; 4618.11,5334.65 4637.8,5291.34 ; v1(4996.06,5039.37) 4877.95,5039.37 4799.21,5118.11 4614.17,5220.47 ; v1@5035.43,5866.14 v1@5039.37,5866.14 ; v1(5275.59,5866.14) 5281.5,5872.05 v1@5281.5,5875.98 ; v1(5472.44,5866.14) 5478.35,5872.05 5478.35,5905.51 ; v1(5543.31,5102.36) 5543.31,5090.55 v1(5590.55,5043.31) 5598.43,5035.43 5618.11,5035.43 5618.11,4901.57 ; v1(5559.06,4476.38) 5566.93,4484.25 5586.61,4484.25 5618.11,4515.75 ; v1(5559.06,5244.09) 5566.93,5251.97 5586.61,5251.97 5618.11,5283.46 ; v1(5570.87,4862.2) 5578.74,4870.08 5586.61,4870.08 5618.11,4901.57 ; v1(5590.55,4657.48) 5618.11,4657.48 5618.11,4515.75 ; v1(5590.55,5429.13) 5594.49,5425.2 5618.11,5425.2 5618.11,5283.46 ; v1(5598.43,4078.74) 5606.3,4086.61 5606.3,4098.43 5625.98,4098.43 5657.48,4129.92 ; v1(5637.8,4271.65) 5657.48,4271.65 5657.48,4129.92 ; v1(5708.66,5625.98) 5732.28,5625.98 5732.28,5629.92 5767.72,5665.35 ; v1(5736.22,3704.72) 5744.09,3712.6 5763.78,3712.6 5795.28,3744.09 ; v1(5767.72,3885.83) 5795.28,3885.83 5795.28,3744.09 ; v1(5877.95,4299.21) 5901.57,4322.83 5901.57,4370.08 v1(5777.56,4474.41) 5755.91,4515.75 5618.11,4515.75 ; v1(5901.57,5066.93) 5925.2,5090.55 5929.13,5090.55 5929.13,5110.24 v1(5771.65,5240.16) 5755.91,5283.46 5618.11,5283.46 ; v1(5909.45,4665.35) 5901.57,4673.23 5901.57,4755.91 v1(5791.34,4866.14) 5755.91,4901.57 5618.11,4901.57 ; v1@5913.39,5838.58 5885.83,5866.14 v1@5767.72,5866.14 ; v1(5929.13,3905.51) 5940.94,3917.32 5940.94,3984.25 v1(5816.93,4094.49) 5795.28,4129.92 5657.48,4129.92 ; v1(6047.24,5440.94) 6051.18,5452.76 6051.18,5519.69 v1(5925.2,5629.92) 5905.51,5665.35 5767.72,5665.35 ; v1(6078.74,3519.68) 6078.74,3598.43 v1(5954.72,3704.72) 5933.07,3744.09 5795.28,3744.09 ; v1(6500,4177.17) 6645.67,4177.17 v1(6645.67,4425.2) v1(6645.67,4669.29) v1(6645.67,4917.32) v1(6645.67,5161.42) 6649.61,5165.35 6649.61,5169.29 v1@6645.67,5173.23 ; v1@4559.06,5433.07 4588.58,5397.64 ; v1@4559.06,5433.07 v1(4559.06,5440.94) ; v1@4559.06,5433.07 4562.99,5437.01 v1(4559.06,5440.94) ; 4588.58,5397.64 4637.8,5291.34 ; 4614.17,5220.47 4637.8,5291.34 ; v1@5039.37,5866.14 5271.65,5866.14 v1@5281.5,5875.98 ; v1@5281.5,5875.98 5281.5,5905.51 5478.35,5905.51 ; 5478.35,5905.51 5566.93,5905.51 5606.3,5866.14 v1(5618.11,5866.14) 5748.03,5866.14 v1(5759.84,5866.14) ; v1(5759.84,5866.14) v1@5767.72,5866.14 ; v1(5759.84,5866.14) 5759.84,5858.27 v1@5767.72,5866.14 ; 5767.72,5665.35 v1@5767.72,5866.14
  Mid-Layer 1, Top-Int w27.56: v1@4616.87,5118.08 v1(4618.11,5118.11)
  Mid-Layer 1, Top-Int w31.5: 4614.17,5220.47 4616.87,5118.08 v1(4618.11,5070.87)
  Bottom Layer, Bottom w5.91: 1R5U.2@4055.12,5566.93 1R5U.2@4055.12,5574.8 ; 4086.61,5519.69 4086.61,5521.65 ; 1C2.2@4173.23,5507.87 4173.23,5515.75 4188.98,5531.5 ; C16.2@4531.5,3677.17 v1@4572.83,3665.35 ; C14.2@4543.31,5539.37 C14.2@4543.31,5551.18 ; v1@4582.68,5539.37 v1(4586.61,5539.37) v1@4590.55,5539.37 ; C49.2@4901.57,3653.54 C49.2@4901.57,3665.35 ; v1(4913.39,5500) C46.2@4913.39,5527.56 ; C46.2@4913.39,5539.37 C46.2@4913.39,5527.56 ; v1@4982.28,3527.56 v1(4982.28,3529.53) ; 2C10.1@5129.92,3681.1 2C10.1@5129.92,3685.04 ; 1C10_.1@5141.73,5555.12 5137.8,5559.06 1R25.2@5074.8,5559.06 5043.31,5527.56 C46.2@4913.39,5527.56 ; XS2.8@5324.8,5966.54 XS2.8@5324.8,5968.5 ; v1(5397.64,5003.94) 5421.26,5003.94 3R2.2@5440.94,4984.25 ; v1(5397.64,5385.83) 5421.26,5385.83 6R2.2@5440.94,5366.14 ; v1(5399.61,4602.36) 5427.17,4602.36 7R2.2@5440.94,4598.43 ; 4R2.2@5476.38,4232.28 4R2.2@5488.19,4220.47 4R2.2@5496.06,4212.6 ; v1(5543.31,4334.65) 5547.24,4334.65 5570.87,4334.65 5594.49,4358.27 5594.49,4413.39 ; v1(5543.31,5102.36) 5543.31,5098.43 5570.87,5098.43 5594.49,5122.05 5594.49,5181.1 ; v1@5547.24,4724.41 v1(5543.31,4720.47) 5570.87,4720.47 5590.55,4746.06 5590.55,4799.21 ; 7R7.1@5559.06,4417.32 5562.99,4413.39 5594.49,4413.39 ; v1(5559.06,4476.38) 5594.49,4476.38 ; 3R7.1@5559.06,4803.15 5562.99,4799.21 5590.55,4799.21 ; 6R7.1@5559.06,5185.04 5562.99,5181.1 5594.49,5181.1 ; v1(5559.06,5244.09) 5594.49,5244.09 ; v1(5570.87,4862.2) 5594.49,4862.2 ; v1@5578.74,3531.5 v1(5578.74,3523.62) ; 5R2.2@5590.55,5748.03 5590.55,5755.91 5598.43,5763.78 5618.11,5783.46 v1(5618.11,5866.14) ; 8R2.2@5618.11,3826.77 5614.17,3846.46 v1@5582.68,3846.46 ; C26.2@5633.86,4476.38 5594.49,4476.38 ; C18.2@5633.86,4862.2 5594.49,4862.2 ; C24.2@5633.86,5244.09 5594.49,5244.09 ; C22.2@5673.23,4090.55 5610.24,4090.55 v1(5598.43,4078.74) 4R7.1@5598.43,4031.5 ; v1@5673.23,5476.38 5673.23,5472.44 v1(5669.29,5468.5) 5708.66,5468.5 5744.09,5503.94 5744.09,5562.99 ; 5R7.1@5708.66,5562.99 5744.09,5562.99 ; v1(5708.66,5625.98) 5744.09,5625.98 ; v1@5718.5,3578.74 v1@5718.5,3576.77 ; C22_.2@5783.46,5625.98 5744.09,5625.98 ; C28.2@5811.02,3704.72 v1(5736.22,3704.72) 8R7.1@5736.22,3647.64 ; C43.1@5901.57,4358.27 5901.57,4307.09 5885.83,4307.09 v1(5877.95,4299.21) 5925.2,4251.97 5972.44,4251.97 6003.94,4220.47 6003.94,4212.6 C36.2@6007.87,4208.66 ; C35.1@5901.57,4744.09 5901.57,4681.1 ; C41.1@5901.57,5125.98 5901.57,5070.87 v1(5901.57,5066.93) 5905.51,5062.99 5909.45,5062.99 5913.39,5062.99 5968.5,5007.87 C34.2@5968.5,4980.31 ; v1(5909.45,4665.35) 5901.57,4673.23 5901.57,4677.17 ; v1@5915.35,5844.49 5917.32,5842.52 v1(5917.32,5838.58) ; v1(5917.32,3527.56) 5925.2,3519.68 v1@5927.17,3519.68 ; v1(5929.13,3905.51) 5940.94,3917.32 C37.1@5940.94,3972.44 ; C42.2@5968.5,4594.49 5968.5,4618.11 5903.54,4683.07 ; C40.2@5968.5,5362.2 5968.5,5413.39 6003.94,5448.82 6039.37,5448.82 v1(6047.24,5440.94) v1@6051.18,5444.88 ; C39.1@6051.18,5507.87 6051.18,5452.76 v1@6051.18,5444.88 ; v1@6066.93,3519.68 v1(6078.74,3519.68) ; C45.1@6078.74,3586.61 v1(6078.74,3519.68) ; v1(6102.36,4433.07) 6114.17,4417.32 6153.54,4417.32 6141.73,4405.51 C58.2@6141.73,4397.64 ; v1(6102.36,5206.69) 6106.3,5196.85 6118.11,5185.04 6157.48,5185.04 6141.73,5169.29 C56.2@6141.73,5165.35 ; v1(6106.3,4814.96) 6102.36,4811.02 6114.17,4799.21 6153.54,4799.21 6141.73,4787.4 C51.2@6141.73,4783.46 ; v1(6141.73,4043.31) 6141.73,4039.37 6153.54,4027.56 C52.2@6192.91,4027.56 ; C52.2@6181.1,4011.81 C52.2@6181.1,4015.75 ; C59.1@6204.72,4456.69 C59.1@6204.72,4464.57 6204.72,4500 6271.65,4566.93 6358.27,4566.93 6366.14,4574.8 6370.08,4574.8 7C10.1@6389.76,4594.49 ; 6244.09,4417.32 6287.4,4417.32 6283.46,4413.39 7R25.2@6295.28,4413.39 ; v1(6255.91,5582.68) 6251.97,5582.68 6271.65,5562.99 6281.5,5562.99 6281.5,5557.09 C54.2@6291.34,5547.24 ; v1(6275.59,3673.23) 6279.53,3653.54 6291.34,3641.73 6318.9,3641.73 C61.2@6330.71,3641.73 ; 3R25.2@6295.28,4799.21 6279.53,4799.21 6287.4,4807.09 6244.09,4807.09 6204.72,4846.46 C50.1@6204.72,4850.39 6204.72,4885.83 6271.65,4952.76 6381.89,4952.76 6389.76,4960.63 3C10.1@6389.76,4980.31 ; 6R25.2@6295.28,5181.1 6R25.2@6287.4,5181.1 ; 4R25.2@6334.65,4027.56 6342.52,4035.43 6279.53,4035.43 6244.09,4070.87 C53.1@6244.09,4078.74 6244.09,4114.17 6311.02,4181.1 6421.26,4181.1 6429.13,4188.98 4C10.1@6429.13,4208.66 6468.5,4208.66 v1(6500,4177.17) ; C60.1@6374.02,3685.04 C61.2@6330.71,3641.73 ; 6C10.1@6389.76,5362.2 6389.76,5342.52 6381.89,5334.65 6271.65,5334.65 6204.72,5267.72 C57.1@6204.72,5232.28 6204.72,5228.35 6248.03,5185.04 6R25.2@6279.53,5185.04 ; 5R25.2@6444.88,5562.99 6397.64,5562.99 6356.3,5604.33 C55.1@6344.49,5604.33 ; 5C10.1@6539.37,5744.09 6537.4,5744.09 6533.46,5744.09 6505.91,5716.54 6421.26,5716.54 6354.33,5649.61 6354.33,5618.11 C55.1@6356.3,5614.17 C55.1@6344.49,5604.33 ; 8C10.1@6566.93,3822.83 6566.93,3807.09 6555.12,3795.28 6440.94,3795.28 6381.89,3736.22 6381.89,3696.85 C60.1@6381.89,3692.91 6381.89,3688.98 6421.26,3649.61 8R25.2@6452.76,3649.61 ; v1(6645.67,4425.2) 6748.03,4425.2 XS1.16@6748.03,4423.23 ; v1(6645.67,4669.29) XS1.11@6748.03,4669.29 XS1.11@6748.03,4665.35 ; v1(6645.67,4917.32) 6748.03,4917.32 XS1.6@6748.03,4915.35 XS1.6@6748.03,4913.39 ; v1(6645.67,5161.42) XS1.1@6748.03,5161.42 ; v1@5277.56,3529.53 5279.53,3531.5 v1@5279.53,3529.53 ; v1@5277.56,3529.53 5275.59,3527.56 v1(5277.56,3527.56) v1@5279.53,3529.53 ; v1@5277.56,3529.53 v1@5279.53,3529.53 ; 5564.96,3527.56 5574.8,3523.62 v1(5578.74,3523.62) ; 5564.96,3527.56 v1(5578.74,3523.62) ; 5564.96,3527.56 5574.8,3527.56 v1(5578.74,3523.62) ; v1@5582.68,3846.46 5582.68,3854.33 v1(5574.8,3846.46) v1@5582.68,3846.46 ; 5590.55,4799.21 5594.49,4862.2 ; 5594.49,4413.39 5594.49,4476.38 ; 5594.49,5181.1 5594.49,5244.09 ; 4R7.1@5598.43,4031.5 5598.43,4027.56 5602.36,4027.56 4R7.1@5598.43,4031.5 ; v1(5712.6,3566.93) 5748.03,3566.93 5771.65,3590.55 5771.65,3614.17 8R7.1@5744.09,3641.73 ; v1(5712.6,3566.93) v1@5717.52,3571.85 ; v1(5712.6,3566.93) 5712.6,3570.87 v1@5717.52,3575.79 ; v1@5717.52,3571.85 v1@5718.5,3572.83 ; v1@5717.52,3571.85 v1@5717.52,3575.79 ; v1@5717.52,3575.79 v1@5718.5,3576.77 ; v1@5717.52,3575.79 v1@5718.5,3574.8 ; v1@5718.5,3572.83 5720.47,3574.8 v1@5718.5,3574.8 ; v1@5718.5,3572.83 v1@5718.5,3574.8 ; v1@5718.5,3574.8 v1@5718.5,3576.77 ; 8R7.1@5736.22,3647.64 5738.19,3647.64 8R7.1@5744.09,3641.73 ; 8R7.1@5736.22,3647.64 5742.13,3641.73 8R7.1@5744.09,3641.73 ; 5744.09,5562.99 5744.09,5625.98 ; 5901.57,4677.17 5901.57,4681.1 ; 5901.57,4677.17 5909.45,4669.29 5903.54,4683.07 ; 5901.57,4681.1 5903.54,4683.07 ; v1@6051.18,5444.88 6251.97,5444.88 6291.34,5492.13 C54.2@6291.34,5547.24 ; v1(6078.74,3519.68) 6078.74,3490.16 6287.4,3490.16 6318.9,3578.74 C61.2@6318.9,3625.98 6318.9,3629.92 C61.2@6330.71,3641.73 ; 6R25.2@6279.53,5185.04 6291.34,5185.04 6R25.2@6287.4,5181.1 ; 6R25.2@6279.53,5185.04 6283.46,5181.1 6R25.2@6287.4,5181.1 ; 6R25.2@6279.53,5185.04 6R25.2@6287.4,5181.1 ; C54.2@6291.34,5547.24 6301.18,5557.09 6301.18,5562.99 6342.52,5604.33 C55.1@6344.49,5604.33 ; 8R25.2@6452.76,3649.61 6460.63,3641.73 8R25.2@6472.44,3641.73 6464.57,3649.61 8R25.2@6452.76,3649.61 ; XS3.20@4982.28,3425.2 4982.28,3427.17 4982.28,3429.13 4984.25,3427.17 4984.25,3425.2 XS3.20@4982.28,3425.2 ; XS2.14@5618.11,5968.5 5620.08,5966.54 XS2.14@5620.08,5968.5 XS2.14@5618.11,5968.5
  Bottom Layer, Bottom w7.87: C44.2@6145.67,3822.83 6244.09,3822.83 6322.83,3744.09 6334.65,3744.09 C60.1@6381.89,3696.85 ; C58.2@6153.54,4417.32 6157.48,4417.32 6200.79,4460.63 6204.72,4456.69 6244.09,4417.32 ; C51.2@6153.54,4799.21 6200.79,4846.46 6244.09,4807.09 ; C56.2@6157.48,5185.04 C57.1@6196.85,5224.41 ; C52.2@6181.1,4011.81 6177.17,4011.81 6181.1,4015.75 6192.91,4027.56 C53.1@6244.09,4078.74
  Bottom Layer, Bottom w11.81: 1R5U.2@4055.12,5574.8 4086.61,5543.31 4086.61,5521.65 ; 2R5U.2@4059.06,3700.79 4059.06,3651.57 4074.8,3610.24 2C2.2@4127.95,3610.24 ; 4074.8,3570.87 v1(4106.3,3570.87) ; 4086.61,5519.69 4086.61,5452.76 4137.8,5401.57 4145.67,5401.57 ; 1C2.2@4173.23,5507.87 4145.67,5480.31 4145.67,5401.57 ; 4188.98,5531.5 4204.72,5547.24 4307.09,5547.24 4311.02,5543.31 1R2.2@4314.96,5547.24 4354.33,5586.61 4354.33,5625.98 ; 4342.52,3751.97 4468.5,3751.97 C16.2@4535.43,3685.04 ; 1R7Q.1@4354.33,5775.59 4354.33,5625.98 ; 1C1U.2@4458.66,5431.1 4425.2,5431.1 4425.2,5405.51 4423.23,5403.54 4423.23,5401.57 4145.67,5401.57 ; C14.2@4543.31,5539.37 v1@4582.68,5539.37 ; C14.2@4543.31,5551.18 4468.5,5625.98 4354.33,5625.98 ; v1@4572.83,3665.35 4572.83,3608.27 ; v1(4574.8,3665.35) 4572.83,3608.27 ; v1@4590.55,5539.37 4608.27,5482.28 ; C30.2@4604.33,5433.07 4608.27,5482.28 ; C32.2@4618.11,3562.99 4572.83,3562.99 4572.83,3608.27 ; 2C7.2@4633.86,3744.09 2C7.2@4635.83,3744.09 4694.88,3744.09 ; 1C7.2@4655.51,5616.14 4706.69,5616.14 ; 2R19.2@4751.97,3751.97 4694.88,3744.09 ; 1R19.2@4763.78,5625.98 4706.69,5616.14 ; v1(4901.57,3625.98) 4901.57,3653.54 5031.5,3653.54 2R25.2@5062.99,3685.04 2C10.1@5129.92,3685.04 ; v1(5437.01,4232.28) 4R2.2@5476.38,4232.28 ; C38.2@6118.11,5744.09 6118.11,5887.8 ; 6120.08,5887.8 6537.4,5887.8 5C10.1@6537.4,5744.09 ; 4572.83,3608.27 4694.88,3608.27 4694.88,3744.09 ; 4608.27,5482.28 4706.69,5482.28 4706.69,5616.14
  Bottom Layer, Bottom w19.68: 2R5U.2@4047.24,3700.79 4055.12,3700.79 2R5U.2@4059.06,3700.79 ; 4074.8,3610.24 4074.8,3570.87 4074.8,3496.06 ; 2C1U.2@4080.71,3395.67 4076.77,3395.67 4074.8,3397.64 4074.8,3496.06 ; 2R2.2@4299.21,3643.7 4370.08,3643.7 ; 2R7.1@4342.52,3901.57 4342.52,3751.97 4342.52,3688.98 4367.68,3650.03 ; 4366.14,3651.57 4367.68,3650.03 ; C16.2@4531.5,3677.17 4531.5,3681.1 C16.2@4535.43,3685.04 ; 4074.8,3496.06 4374.02,3496.06 4374.02,3643.7 ; 4367.68,3650.03 4370.08,3643.7 ; 4367.68,3650.03 4374.02,3643.7 ; 4370.08,3643.7 4374.02,3643.7
  Bottom Layer, Bottom w31.5: XS4.1@4511.81,4232.28 v1(4618.11,4232.28) ; XS4.18@4511.81,5068.9 4511.81,5070.87 4515.75,5070.87 v1(4618.11,5070.87) ; XS4.19@4511.81,5118.11 v1(4618.11,5118.11) ; XS2.1@4980.31,5968.5 4980.31,5893.7 5007.87,5866.14 5027.56,5866.14 5029.53,5868.11 ; XS3.20@4982.28,3429.13 v1@4982.28,3527.56 ; XS2.2@5029.53,5970.47 XS2.2@5029.53,5968.5 5029.53,5868.11 ; v1(5043.31,5862.2) 5037.4,5868.11 5033.46,5868.11 5029.53,5868.11 ; XS2.7@5275.59,5968.5 v1(5275.59,5866.14) 5311.02,5866.14 5324.8,5879.92 XS2.8@5324.8,5966.54 ; XS3.14@5277.56,3425.2 v1(5277.56,3527.56) ; XS2.13@5570.87,5968.5 5570.87,5885.83 5588.58,5868.11 ; XS3.8@5572.83,3423.23 XS3.8@5572.83,3425.2 5572.83,3517.72 v1(5578.74,3523.62) ; v1(5618.11,5866.14) 5590.55,5866.14 5588.58,5868.11 ; XS2.14@5620.08,5966.54 5620.08,5868.11 5588.58,5868.11 ; v1@5915.35,5844.49 XS2.20@5915.35,5968.5 5915.35,5970.47 XS2.20@5915.35,5974.41 ; XS3.1@5917.32,3425.2 5917.32,3503.94 v1(5917.32,3527.56)
IN1Q: 1C1.1 XS2.21 | length 1030.5
  Top Layer, Top w5.91: v1(4877.95,5944.88) 4881.89,5940.94 4925.2,5940.94 4929.13,5944.88 4929.13,5968.5 XS2.21@4931.1,5968.5
  Bottom Layer, Bottom w5.91: 1C1.1@4124.02,6009.84 4135.83,5976.38 4240.16,5976.38 4330.71,5834.65 4507.87,5834.65 4531.5,5811.02 4649.61,5811.02 4708.66,5870.08 4854.33,5870.08 4877.95,5893.7 v1(4877.95,5944.88)
IN1U: 1C1U.1 1R1U.2 XS2.22 | length 2094.9
  Top Layer, Top w5.91: v1(4015.75,5503.94) 4023.62,5503.94 4043.31,5503.94 4039.37,5500 1R1U.2@4055.12,5484.25 ; v1(4015.75,5874.02) 4033.46,5870.08 v1(4423.23,5870.08) ; v1(4842.52,5901.57) 4854.33,5901.57 4854.33,5893.7 4877.95,5870.08 4964.57,5870.08 4980.31,5885.83 4980.31,5893.7 4980.31,5897.64 XS2.22@4980.31,5968.5
  Bottom Layer, Bottom w5.91: v1(4015.75,5874.02) v1@4015.75,5511.81 ; v1(4423.23,5870.08) 4492.13,5870.08 4539.37,5822.83 4641.73,5822.83 4720.47,5901.57 v1(4842.52,5901.57) ; 1C1U.1@4458.66,5312.99 4385.83,5385.83 4131.89,5385.83 4015.75,5501.97 v1(4015.75,5503.94) v1@4023.62,5503.94 ; v1@4015.75,5511.81 v1@4023.62,5503.94 ; v1@4015.75,5511.81 4019.68,5507.87 v1@4023.62,5503.94
IN2Q: 2C1.1 XS2.27 | length 2883.1
  Top Layer, Top w5.91: v1(4496.06,4055.12) 4496.06,4023.62 5023.62,4023.62 5149.61,4149.61 5149.61,4657.48 5129.92,4677.17 5129.92,4708.66 5149.61,4728.35 5149.61,5425.2 5173.23,5448.82 5244.09,5448.82 5307.09,5511.81 5307.09,5767.72 5228.35,5846.46 5228.35,5968.5 XS2.27@5226.38,5968.5
  Bottom Layer, Bottom w5.91: v1(4496.06,4055.12) 4496.06,4023.62 4600.39,4023.62 2C1.1@4598.43,3990.16
IN2U: 2C1U.1 2R1U.2 XS2.28 | length 3883.4
  Top Layer, Top w5.91: v1(4043.31,3566.93) 2R1U.2@4043.31,3618.11 4043.31,3669.29 3984.25,3728.35 3984.25,3881.89 4070.87,3968.5 4342.52,3968.5 4385.83,4011.81 5031.5,4011.81 5165.35,4145.67 5165.35,4665.35 5145.67,4685.04 5145.67,4704.72 5165.35,4724.41 5165.35,5421.26 5181.1,5437.01 5251.97,5437.01 5318.9,5503.94 5318.9,5862.2 5287.4,5893.7 5283.46,5897.64 XS2.28@5279.53,5897.64 ; XS2.28@5275.59,5968.5 XS2.28@5279.53,5964.57 ; XS2.28@5279.53,5897.64 XS2.28@5279.53,5964.57 ; XS2.28@5279.53,5897.64 5275.59,5901.57 5275.59,5960.63 XS2.28@5279.53,5964.57
  Bottom Layer, Bottom w5.91: 2C1U.1@3962.6,3395.67 3964.57,3393.7 3964.57,3505.72 4025.78,3566.93 v1(4043.31,3566.93)